# Altium PCB PCB2.PcbDoc
Units mm, origin at the board's own origin, x right, y up, seen from the top; angles counter-clockwise.
Board outline 68.2 x 37.21 mm, 2 copper layers (Top Layer, Bottom Layer); 17 components, 13 nets, 58 pads, 0 vias.
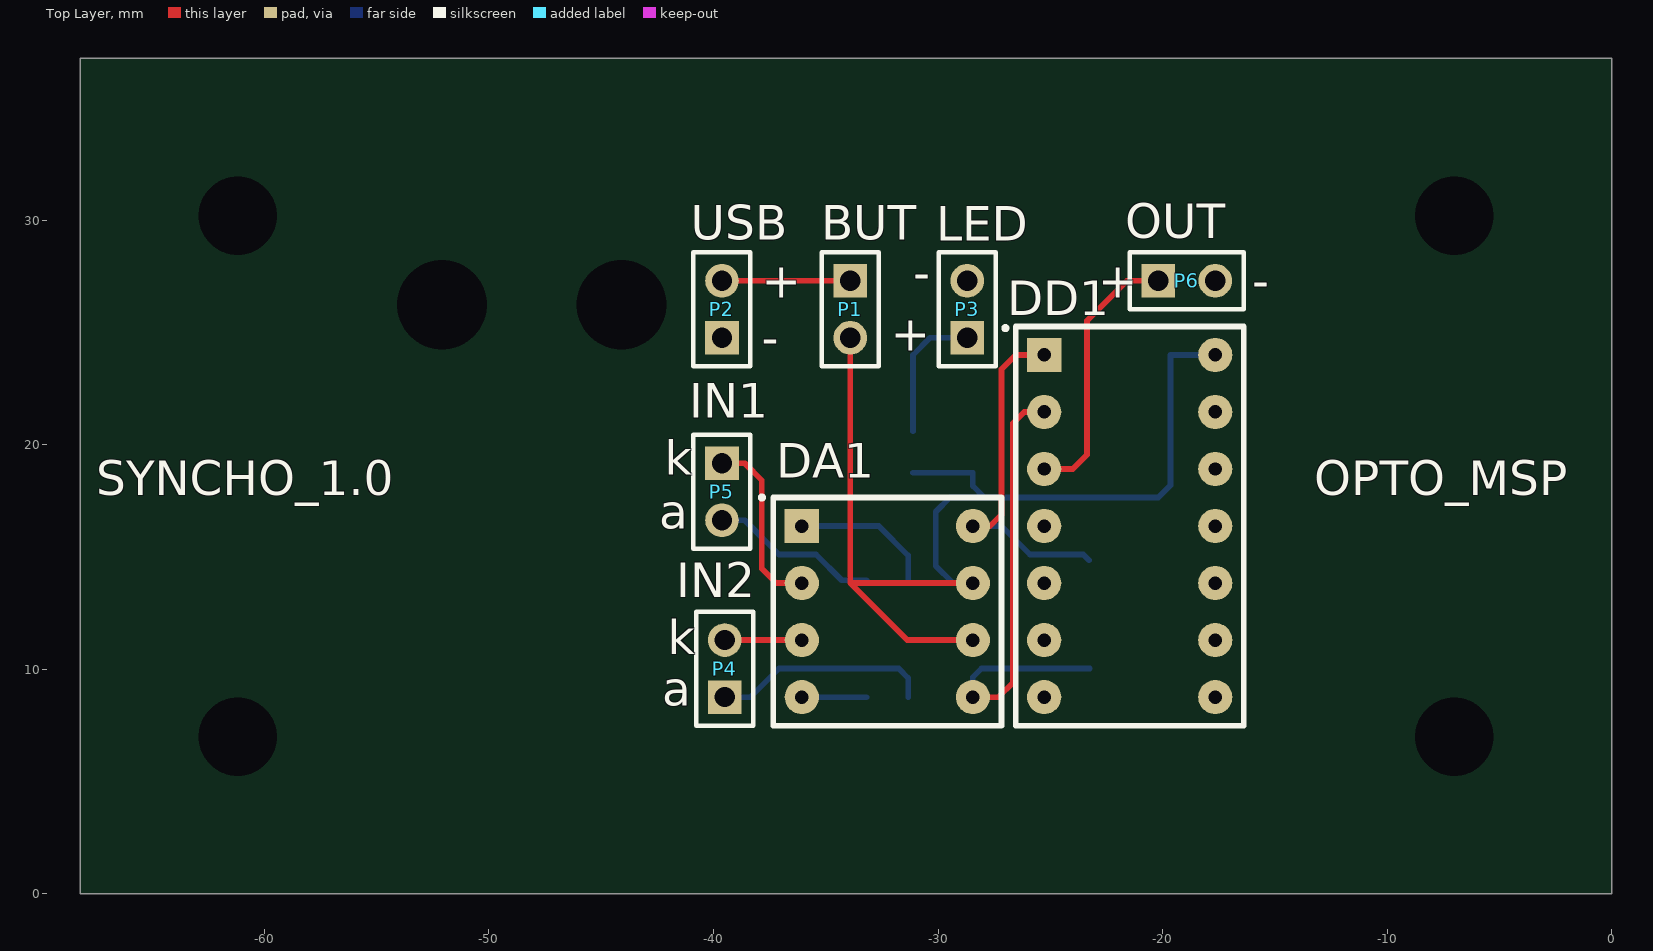
[diagram p0: Top Layer view]
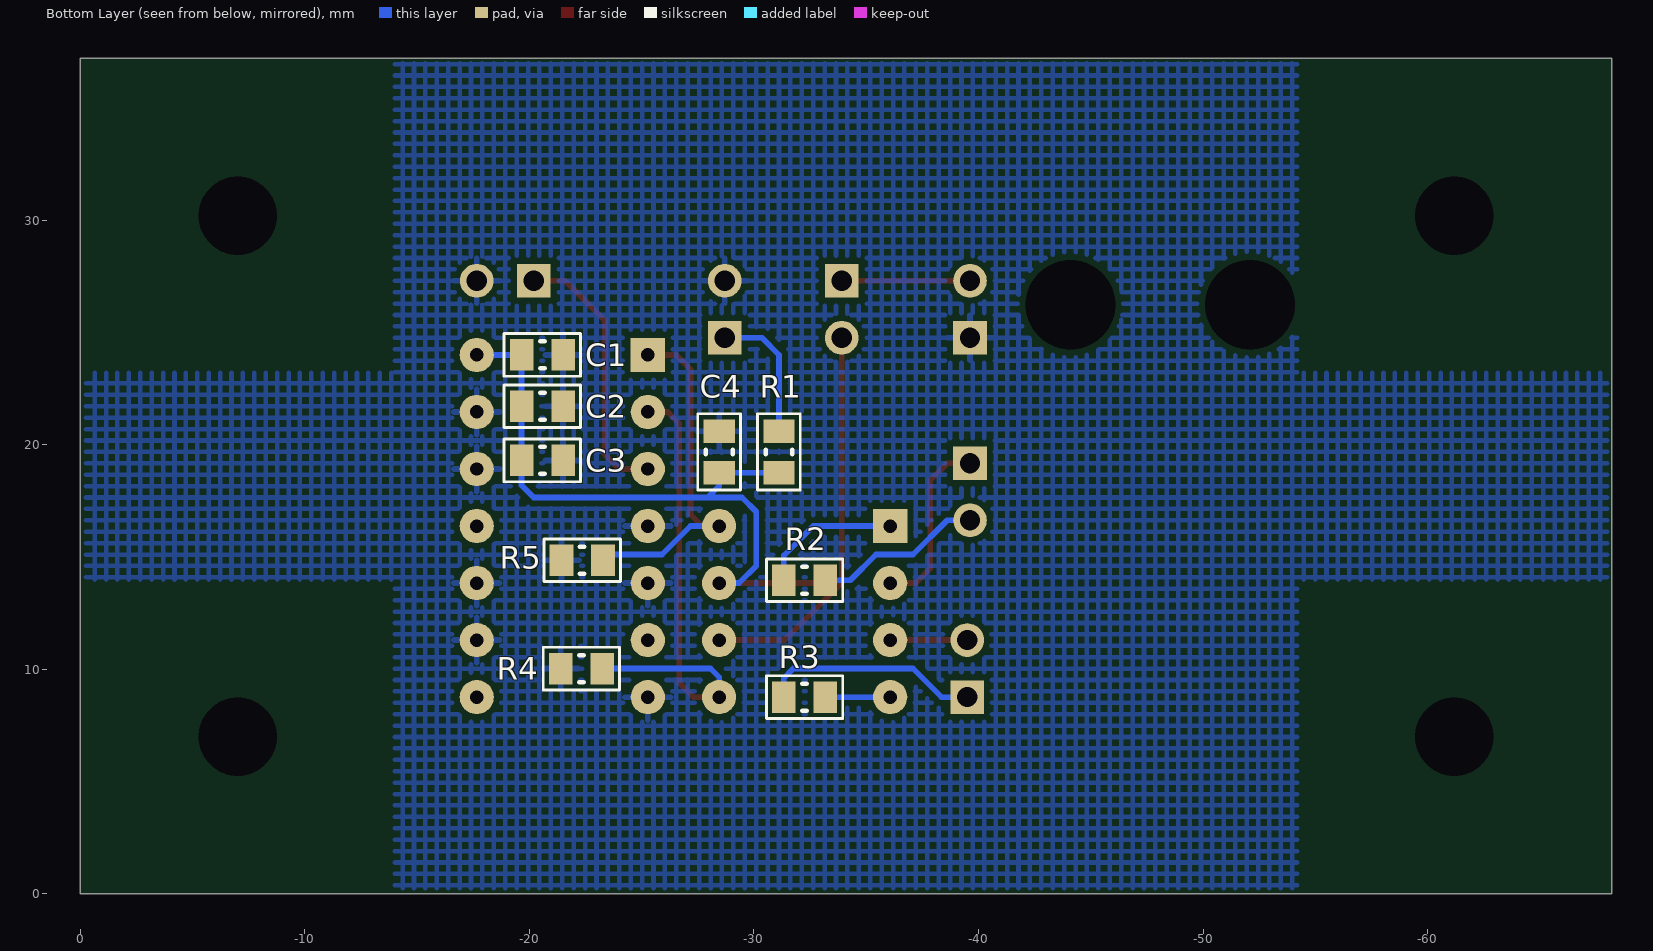
[diagram p1: Bottom Layer view, seen from below]

## Layer stack, top to bottom
Top Solder: solder mask 0.0102, Solder Resist, Dk 3.5
Top Layer: signal copper 0.0356
Dielectric 1: dielectric 0.32, FR-4, Dk 4.8
Bottom Layer: signal copper 0.0356
Bottom Solder: solder mask 0.0102, Solder Resist, Dk 3.5

## Board outline
-68.199,0 0,0 0,37.211 -68.199,37.211

## Design rules (kind name [scope] priority, off if disabled: settings)
Clearance [All] p1: gap=0.254 ignorepadtopadclearanceinfootprint=FALSE except(0: Arc-Hole Track-Hole SMDPad-Hole THPad-Hole Via-Hole Fill-Hole Poly-Hole Region-Hole Text-Hole)
PolygonConnect [All] p1: connectstyle=Relief reliefconductorwidth=0.254 reliefentries=4 polygonreliefangle="90 Angle" airgapwidth=0.254
RoutingVias [All] p1: holewidth=0.711 width=1.27 viastyle="Through Hole" minholewidth=0.711 minwidth=1.27 maxholewidth=0.711 maxwidth=1.27
SolderMaskExpansion [All] p1: expansion=0.102
Width [All] p1: maxlimit=0.254 minlimit=0.254 preferedwidth=0.254
30 further rules are at their usual default settings.

## Components (designator, comment, footprint, x,y, rotation, side; value= is the part's Value field where it differs from the comment)
C1 "0.01мк" "RES 0805" -20.574,24.003 r0 bottom
C2 "0.1мк" "RES 0805" -20.574,21.717 r0 bottom
C3 "1мк" "RES 0805" -20.574,19.304 r0 bottom
C4 "22мк" "RES 0805" -28.448,19.685 r270 bottom
DA1 "KP249KH2A" SCS-8 -37.338,7.493 r0 top
DD1 "IN74AC08N" SCS-14 -26.543,7.493 r0 top
P1 "BUT" HDR1X2 -33.909,27.305 r270 top
P2 "USB" HDR1X2 -39.624,24.765 r90 top
P3 "LED" HDR1X2 -28.702,24.765 r90 top
P4 "IN2" HDR1X2 -39.497,8.763 r90 top
P5 "IN1" HDR1X2 -39.624,19.177 r270 top
P6 "OUT" HDR1X2 -20.193,27.305 r0 top
R1 "510 Ом" "RES 0805" -31.115,19.685 r90 bottom
R2 "5.1кОм" "RES 0805" -32.258,13.97 r0 bottom
R3 "5.1кОм" "RES 0805" -32.258,8.763 r180 bottom
R4 "2.5кОм" "RES 0805" -22.316,10.033 r180 bottom
R5 "2.5кОм" "RES 0805" -22.352,14.859 r180 bottom

## Footprints (in the part's own frame and the unit in brackets; to place one, negate y for a bottom-side part, rotate by r counter-clockwise, add the part's x,y. Pads: shape width x height; smd on the part's side, far side on the other; paste and mask are expansions set on the pad)
HDR1X2 [mm] "Connector; Header; 2 Position"
  rect 1.5x1.5 hole 0.9: 1(0,0)
  round 1.5 hole 0.9: 2(2.54,0)
  silkscreen extent -1.27,-1.27 3.81,1.27
"RES 0805" [mm]
  rect 1.05x1.4 smd: 1(-0.925,0) 2(0.925,0)
  silkscreen extent -1.7,-0.95 1.7,0.95, body extent -1.1,-0.7 1.1,0.7, height 1
SCS-8 [mil] "DIP панель 8 контактов"
  rect 60x60 hole 23.62: 1(50,350)
  round 60 hole 23.62: 2(50,250) 3(50,150) 4(50,50) 5(350,50) 6(350,150) 7(350,250) 8(350,350)
  silkscreen extent 0,0 400,400
SCS-14 [mil] "DIP панель 14 контактов"
  rect 60x60 hole 23.62: 1(50,650)
  round 60 hole 23.62: 2(50,550) 3(50,450) 4(50,350) 5(50,250) 6(50,150) 7(50,50) 8(350,50) 9(350,150) 10(350,250) 11(350,350) 12(350,450) 13(350,550) 14(350,650)
  silkscreen extent 0,0 400,700

## Part data
C1 C2 C3 C4: library part CAP
P1 P2 P3 P4 P5 P6: library part "Header 2", "Header, 2-Pin", LatestRevisionDate=17-Jul-2002, LatestRevisionNote="Re-released for DXP Platform.", Publisher="Altium Limited"
R1 R2 R3 R4 R5: library part RES

## Free pads (board coordinates)
  round 0 hole 3.5: 2(-61.199,7) 2(-61.199,30.211) 2(-7,7) 2(-7,30.211)
  round 0 hole 4: 2(-52.094,26.238) 2(-44.094,26.238)

## Nets (pads, with @x,y where several pads share a name; then routed paths per layer and width w, separated by ;. In a path a pad name is that pad's centre, name@x,y a point inside that pad or via, vN(x,y) a via of type N, cw(c..) or ccw(c..) an arc to the next point about the centre after c; other vN are vias at no path point)
GND: C1.1 C2.1 C3.1 C4.1 DD1.4 DD1.5 DD1.7 DD1.9 DD1.10 DD1.12 DD1.13 P2.1 P3.2 P6.2 R4.1 R5.1
NetDA1_1: DA1.1 R2.2 | length 6.4
  Bottom Layer w0.254: DA1.1 -32.639,16.383 -31.333,15.077 R2.2
NetDA1_2: DA1.2 P5.1 | length 8.1
  Top Layer w0.254: P5.1 -38.608,19.177 -37.846,18.415 -37.846,14.478 -37.211,13.843 DA1.2
NetDA1_3: DA1.3 P4.2 | length 3.4
  Top Layer w0.254: P4.2 DA1.3
NetDA1_4: DA1.4 R3.2 | length 2.9
  Bottom Layer w0.254: DA1.4 R3.2
NetDA1_5: DA1.5 DD1.2 R4.2 | length 21.5
  Top Layer w0.254: DA1.5 -27.305,8.763 -26.67,9.398 -26.67,20.955 -26.162,21.463 DD1.2
  Bottom Layer w0.254: DA1.5 -28.448,9.652 -28.067,10.033 R4.2
NetDA1_8: DA1.8 DD1.1 R5.2 | length 15.9
  Top Layer w0.254: DA1.8 -27.686,16.383 -27.178,16.891 -27.178,23.368 -26.543,24.003 DD1.1
  Bottom Layer w0.254: DA1.8 -27.178,16.383 -25.908,15.113 -23.531,15.113 R5.2
NetDD1_3: DD1.3 P6.1 | length 12
  Top Layer w0.254: DD1.3 -24.003,18.923 -23.368,19.558 -23.368,25.527 -21.59,27.305 P6.1
NetP1_1: P1.1 P2.2 | length 5.7
  Top Layer w0.254: P2.2 P1.1
NetP3_1: P3.1 R1.2 | length 6.1
  Bottom Layer w0.254: R1.2 -31.115,24.003 -30.353,24.765 P3.1
NetP4_1: P4.1 R3.1 | length 9.7
  Bottom Layer w0.254: P4.1 -38.354,8.763 -37.084,10.033 -31.75,10.033 -31.333,9.616 R3.1
NetP5_2: P5.2 R2.1 | length 7.5
  Bottom Layer w0.254: P5.2 -38.608,16.637 -37.084,15.113 -35.433,15.113 -34.29,13.97 R2.1
VCC: C1.2 C2.2 C3.2 C4.2 DA1.6 DA1.7 DD1.14 P1.2 R1.1 | length 50
  Top Layer w0.254: P1.2 -33.909,13.843 ; DA1.6 -31.369,11.303 -33.909,13.843 ; DA1.7 -33.909,13.843
  Bottom Layer w0.254: R1.1 C4.2 -28.448,18.161 -27.94,17.653 ; DA1.7 -29.337,13.843 -30.099,14.605 -30.099,17.018 -29.464,17.653 -27.94,17.653 ; DD1.14 C1.2 C2.2 C3.2 -19.649,18.197 -20.193,17.653 -27.94,17.653
pads on no net: DD1.6 DD1.8 DD1.11

## Polygon pours and split planes (outlines as drawn)
GND on Bottom Layer "NONET_L02_P-001" (hatched 90Degree grid 0.508 track 0.203, remove dead copper, pour order 11): -0.25,0.25 -0.25,37 -68,37 -68,0.25

## Other copper
Bottom Layer:
  pour cut-out: 0,0 0,14 -14,14 -14,0
  pour cut-out: 0,37.211 -14,37.211 -14,23.211 0,23.211
  pour cut-out: -54.199,37.211 -54.199,23.211 -68.199,23.211 -68.199,37.211
  pour cut-out: -68.199,0 -68.199,14 -54.199,14 -54.199,0

## Silkscreen, mask and mechanical layers (free items; w line width, h text height)
Top Overlay:
  circle w0.254: c-27,25.197 r0.051
  circle w0.254: c-37.846,17.653 r0.051
  pour cut-out: -68.199,0
  text "-" at -30.353,28.067 h1.52 r180
  text "+" at -37.846,26.543 h1.52
  text "+" at -22.86,26.543 h1.52
  text "-" at -16.002,26.543 h1.52
  text "+" at -30.353,25.527 h1.52 r180
  text "-" at -37.846,24.003 h1.52
  text "k" at -42.164,18.669 h1.52
  text "SYNCHO_1.0" at -67.5,17.75 h1.52
  text "OPTO_MSP" at -13.25,17.75 h1.52
  text "a" at -42.418,16.256 h1.52
  text "k" at -42.037,10.668 h1.52
  text "a" at -42.291,8.382 h1.52
Mechanical 1:
  the board outline again, w0.254